# EAGLE board SWITCHBOARD (EAGLE 7.4.0)
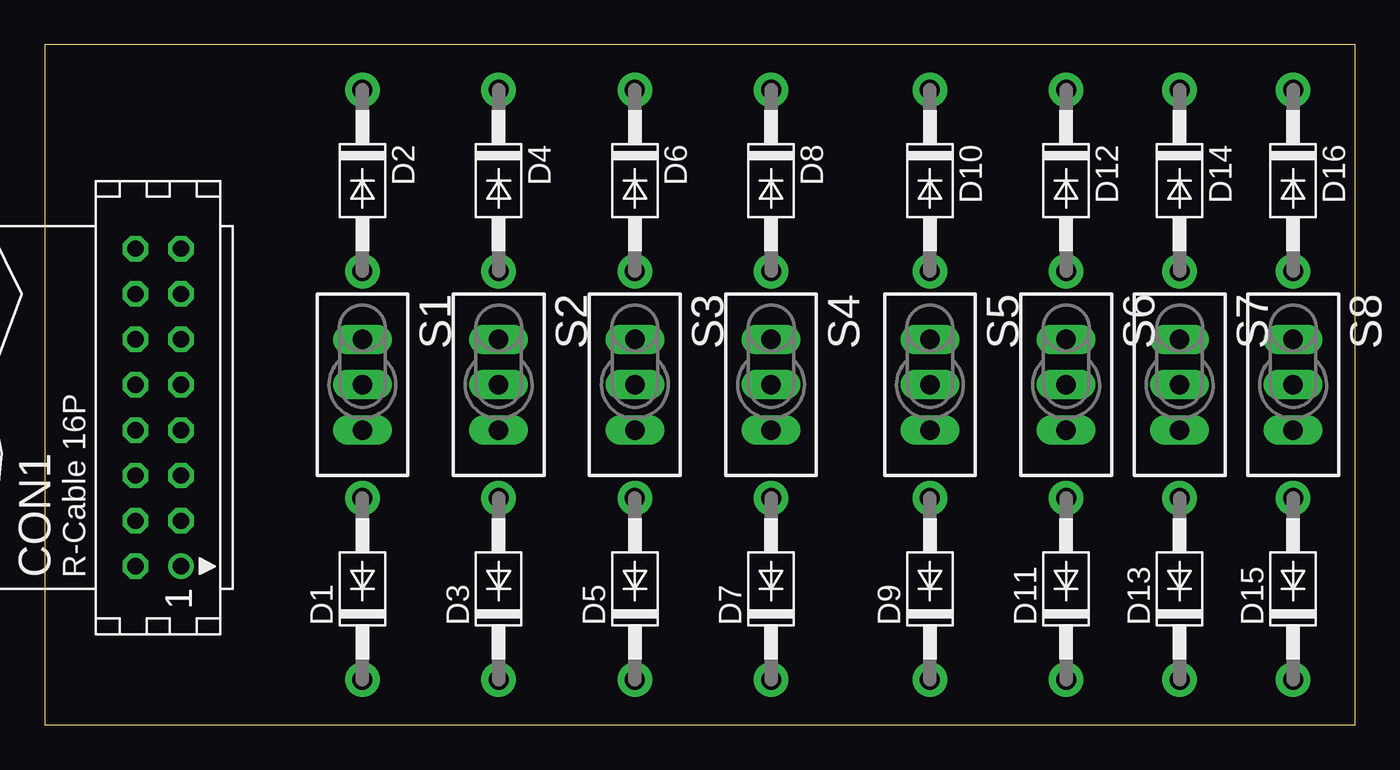
[diagram p0: board, top side]
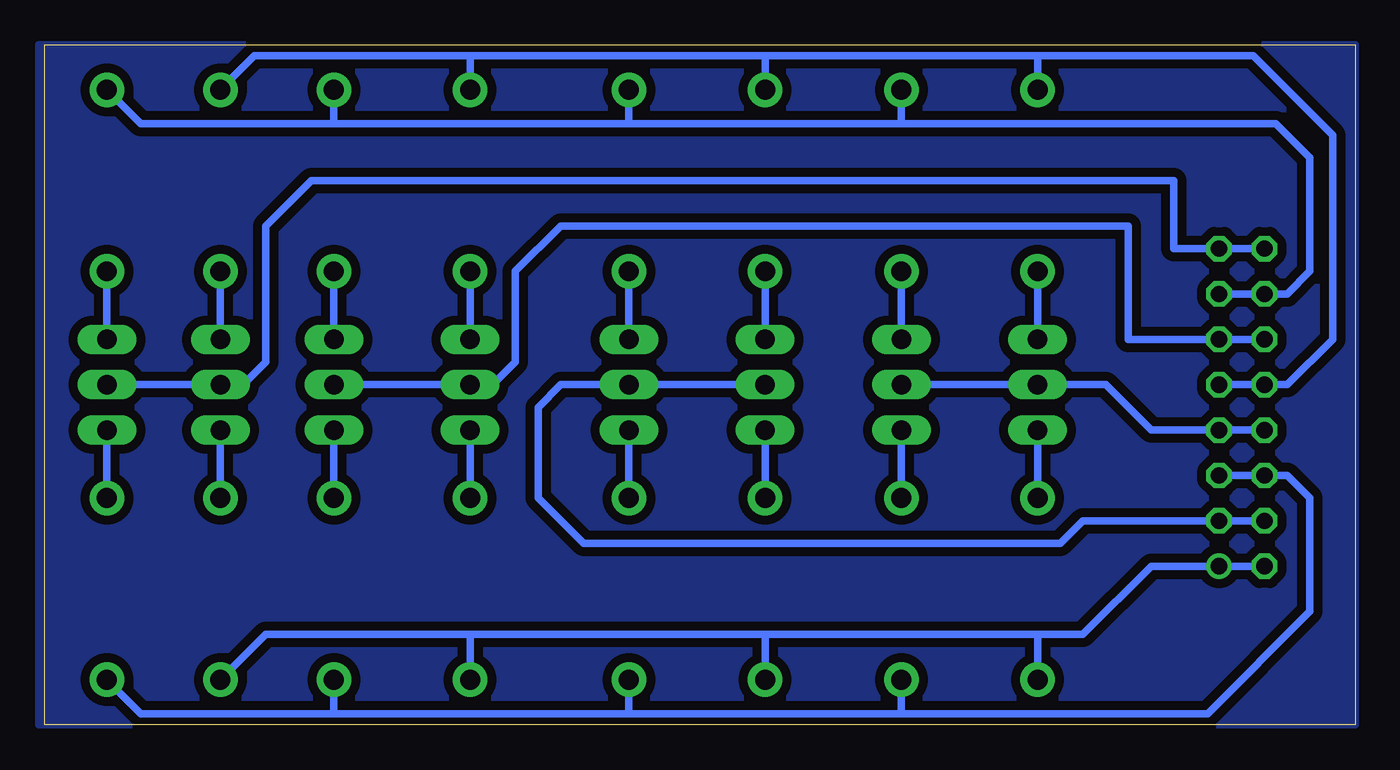
[diagram p1: board, bottom side, seen from below]

Size 73.33 x 38.09 mm. Coordinates in mm from the lower left corner, seen from the top.
Outline: 0,0 73.33,0 73.33,38.09 0,38.09 0,0
Copper layers (1*16): Top 0.035mm / dielectric 1.5mm / Bottom 0.035mm
Design rules "default *": minimum track width 10mil, minimum drill 24mil, track to track 20mil, track to pad 20mil, pad to pad 20mil, via to via 8mil, smd to smd 8mil, copper to edge 0mil, drill to drill 8mil, minimum pad ring 10mil, minimum via ring 8mil, stop-mask expansion 4mil, vias tented up to drill 0mil, thermal gap 10mil

## Footprints (pad centres in the part's own frame; a part is rotated, then mirrored left to right if it is on the bottom)
CON16 = drill 0.914: 1 -8.89,-1.27 | drill 0.914 octagon: 2 -8.89,1.27; 3 -6.35,-1.27; 4 -6.35,1.27; 5 -3.81,-1.27; 6 -3.81,1.27; 7 -1.27,-1.27; 8 -1.27,1.27; 9 1.27,-1.27; 10 1.27,1.27; 11 3.81,-1.27; 12 3.81,1.27; 13 6.35,-1.27; 14 6.35,1.27; 15 8.89,-1.27; 16 8.89,1.27
DO41-10 = drill 1.118 pad 1.93: A 5.08,0; C -5.08,0
TL3XPO = drill 1.1 pad 1.422 long: 1 -2.54,0; 2 0,0; 3 2.54,0

## Placement (x,y rotation side)
CON1  [CON16]  6.35,17.78 90 top
D1  1N4004  [DO41-10]  17.78,7.62 90 top
D2  1N4004  [DO41-10]  17.78,30.48 270 top
D3  1N4004  [DO41-10]  25.4,7.62 90 top
D4  1N4004  [DO41-10]  25.4,30.48 270 top
D5  1N4004  [DO41-10]  33.02,7.62 90 top
D6  1N4004  [DO41-10]  33.02,30.48 270 top
D7  1N4004  [DO41-10]  40.64,7.62 90 top
D8  1N4004  [DO41-10]  40.64,30.48 270 top
D9  1N4004  [DO41-10]  49.53,7.62 90 top
D10  1N4004  [DO41-10]  49.53,30.48 270 top
D11  1N4004  [DO41-10]  57.15,7.62 90 top
D12  1N4004  [DO41-10]  57.15,30.48 270 top
D13  1N4004  [DO41-10]  63.5,7.62 90 top
D14  1N4004  [DO41-10]  63.5,30.48 270 top
D15  1N4004  [DO41-10]  69.85,7.62 90 top
D16  1N4004  [DO41-10]  69.85,30.48 270 top
S1  TL37PO  [TL3XPO]  17.78,19.05 270 top
S2  TL37PO  [TL3XPO]  25.4,19.05 270 top
S3  TL37PO  [TL3XPO]  33.02,19.05 270 top
S4  TL37PO  [TL3XPO]  40.64,19.05 270 top
S5  TL37PO  [TL3XPO]  49.53,19.05 270 top
S6  TL37PO  [TL3XPO]  57.15,19.05 270 top
S7  TL37PO  [TL3XPO]  63.5,19.05 270 top
S8  TL37PO  [TL3XPO]  69.85,19.05 270 top

## Library data of the parts
CON1 = con-harting; OC_FARNELL: unknown; OC_NEWARK: unknown
D1-D16 = adafruit
S1-S8 = switch

## Nets
N$1: D1.A S1.3
N$2: D2.A S1.1
N$3: D3.A S2.3
N$4: D4.A S2.1
N$5: D5.A S3.3
N$6: D6.A S3.1
N$7: D7.A S4.3
N$8: D8.A S4.1
N$9: D9.A S5.3
N$10: D10.A S5.1
N$11: D11.A S6.3
N$12: D12.A S6.1
N$13: D13.A S7.3
N$14: D14.A S7.1
N$15: D15.A S8.3
N$16: D16.A S8.1
N$17: CON1.9 CON1.10 D2.C D6.C D10.C D14.C
N$18: CON1.1 CON1.2 D1.C D5.C D9.C D13.C
N$20: CON1.13 CON1.14 D4.C D8.C D12.C D16.C
N$21: CON1.7 CON1.8 S1.2 S2.2
N$22: CON1.3 CON1.4 S3.2 S4.2
N$23: CON1.11 CON1.12 S5.2 S6.2
N$24: CON1.15 CON1.16 S7.2 S8.2
N$26: CON1.5 CON1.6 D3.C D7.C D11.C D15.C

## Tracks (layer width: path | path; a pad name or v marks a point on that pad's centre or on a via)
N$1
  Bottom 0.406: S1.3 D1.A
N$2
  Bottom 0.406: S1.1 D2.A
N$3
  Bottom 0.406: D3.A S2.3
N$4
  Bottom 0.406: S2.1 D4.A
N$5
  Bottom 0.406: S3.3 D5.A
N$6
  Bottom 0.406: S3.1 D6.A
N$7
  Bottom 0.406: D7.A S4.3
N$8
  Bottom 0.406: S4.1 D8.A
N$9
  Bottom 0.406: S5.3 D9.A
N$10
  Bottom 0.406: S5.1 D10.A
N$11
  Bottom 0.406: D11.A S6.3
N$12
  Bottom 0.406: S6.1 D12.A
N$13
  Bottom 0.406: S7.3 D13.A
N$14
  Bottom 0.406: S7.1 D14.A
N$15
  Bottom 0.406: D15.A S8.3
N$16
  Bottom 0.406: S8.1 D16.A
N$17
  Bottom 0.406: 17.78,37.47 5.71,37.47 1.27,33.02 1.27,21.59 3.81,19.05 CON1.10 CON1.9 | 17.78,37.47 33.02,37.47 | 33.02,37.47 49.53,37.47 | 49.53,37.47 61.59,37.47 D14.C | D2.C 17.78,37.47 | D6.C 33.02,37.47 | D10.C 49.53,37.47
N$18
  Bottom 0.406: CON1.2 CON1.1 11.43,8.89 15.24,5.08 17.78,5.08 | 17.78,5.08 33.02,5.08 | 33.02,5.08 49.53,5.08 | 49.53,5.08 60.96,5.08 D13.C | D1.C 17.78,5.08 | D5.C 33.02,5.08 | D9.C 49.53,5.08
N$19
  pour Bottom: 0,38.1 73.66,38.1 73.66,0 0,0
N$20
  Bottom 0.406: CON1.14 CON1.13 3.81,24.13 2.54,25.4 2.54,31.75 4.45,33.66 25.4,33.66 | 25.4,33.66 40.64,33.66 | 40.64,33.66 57.15,33.66 | 57.15,33.66 67.94,33.66 D16.C | D12.C 57.15,33.66 | D8.C 40.64,33.66 | D4.C 25.4,33.66
N$21
  Bottom 0.406: CON1.8 CON1.7 11.43,16.51 13.97,19.05 S1.2 S2.2
N$22
  Bottom 0.406: CON1.4 CON1.3 15.24,11.43 16.51,10.16 43.18,10.16 45.72,12.7 45.72,17.78 44.45,19.05 S4.2 S3.2
N$23
  Bottom 0.406: CON1.12 CON1.11 12.7,21.59 12.7,27.94 44.45,27.94 46.99,25.4 46.99,20.32 48.26,19.05 S5.2 S6.2
N$24
  Bottom 0.406: CON1.16 CON1.15 10.16,26.67 10.16,30.48 58.42,30.48 60.96,27.94 60.96,20.32 62.23,19.05 S7.2 S8.2
N$26
  Bottom 0.406: CON1.6 CON1.5 3.81,13.97 2.54,12.7 2.54,6.35 8.26,0.64 25.4,0.64 | 25.4,0.64 40.64,0.64 | 40.64,0.64 57.15,0.64 | 57.15,0.64 67.94,0.64 D15.C | D11.C 57.15,0.64 | D7.C 40.64,0.64 | D3.C 25.4,0.64